# EAGLE board pcb (EAGLE 6.1)
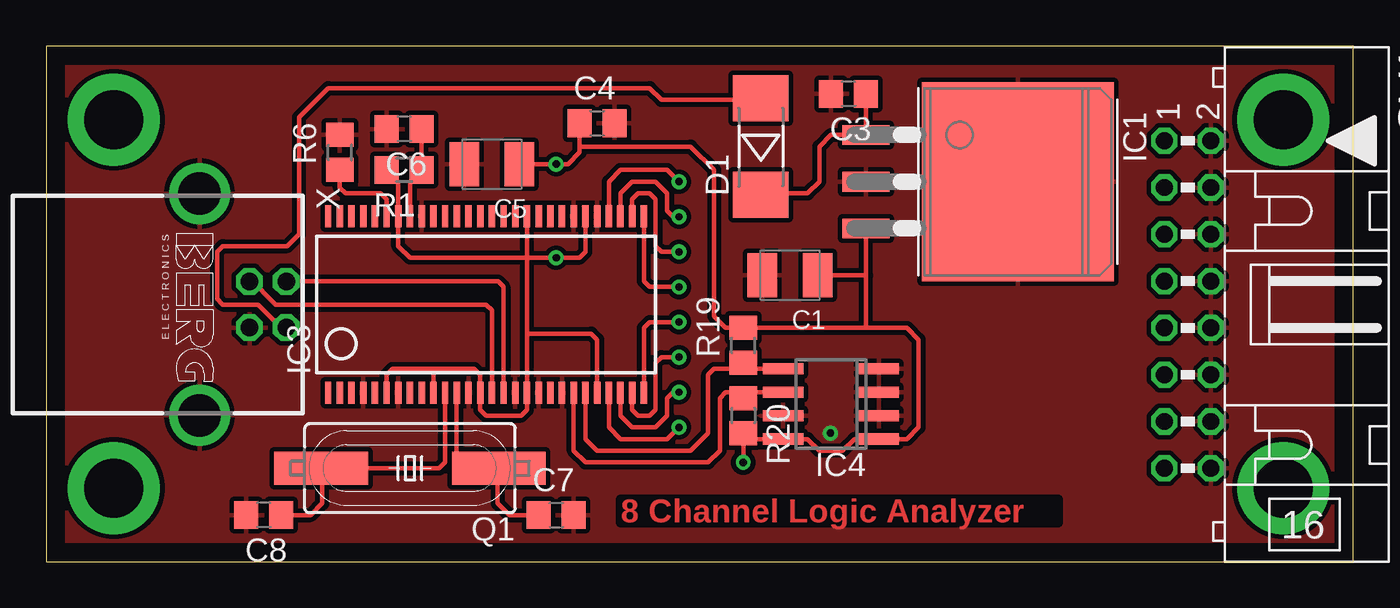
[diagram p0: board, top side]
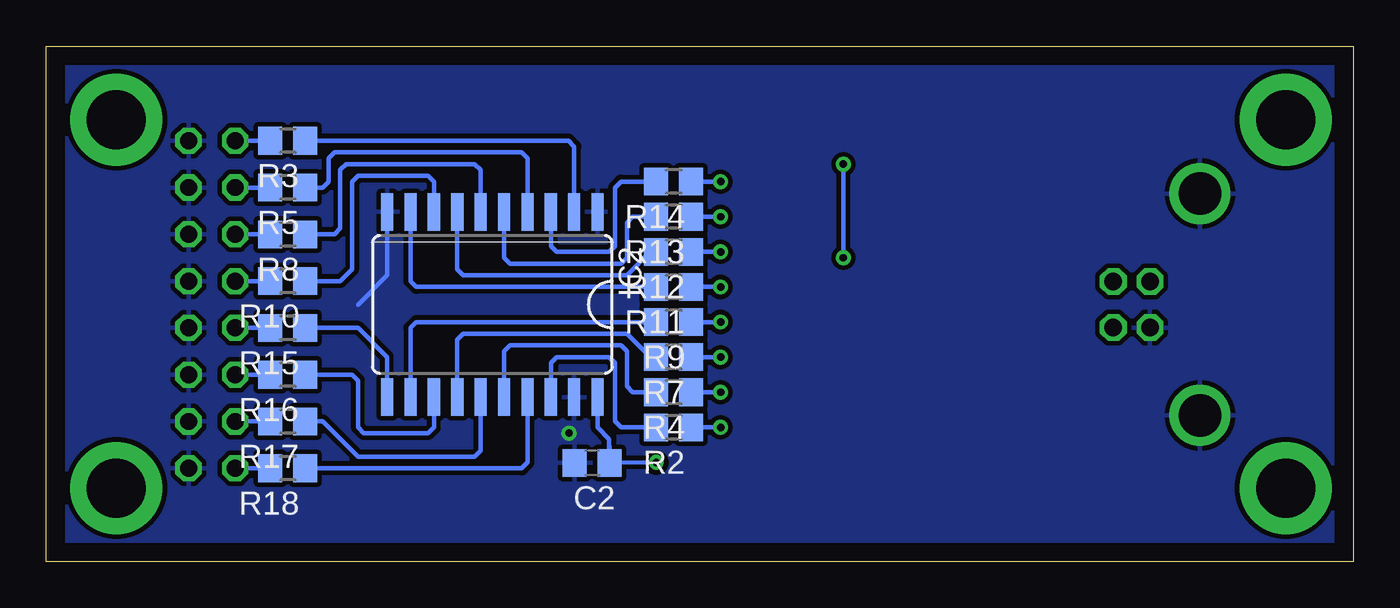
[diagram p1: board, bottom side, seen from below]

Size 71 x 28 mm. Coordinates in mm from the lower left corner, seen from the top.
Outline: 0,0 71,0 71,28 0,28 0,0
Copper layers (1*16): Top 0.035mm / dielectric 1.5mm / Bottom 0.035mm
Design rules: minimum track width 10mil, minimum drill 24mil, track to track 10mil, track to pad 10mil, pad to pad 10mil, via to via 10mil, smd to smd 10mil, copper to edge 40mil, drill to drill 8mil, minimum pad ring 10mil, minimum via ring 8mil, stop-mask expansion 4mil, vias tented up to drill 0mil, thermal gap 10mil

## Footprints (pad centres in the part's own frame; a part is rotated, then mirrored left to right if it is on the bottom)
SMC_B = smd 1.6 x 2.4: + -1.5,0; - 1.5,0
C0805 = smd 1.3 x 1.5: 1 -0.95,0; 2 0.95,0
MELF-MLL41 = smd 2.5 x 3: A 2.625,0; C -2.625,0
TO263 = smd 1.067 x 2.54: GND 0,0; IN -2.54,0; OUT 2.54,0 | smd 10.795 x 10.414: GND@ 0,8.255
SO20W = smd 0.66 x 2.032: 1 -5.715,-5.029; 2 -4.445,-5.029; 3 -3.175,-5.029; 4 -1.905,-5.029; 5 -0.635,-5.029; 6 0.635,-5.029; 7 1.905,-5.029; 8 3.175,-5.029; 9 4.445,-5.029; 10 5.715,-5.029; 11 5.715,5.029; 12 4.445,5.029; 13 3.175,5.029; 14 1.905,5.029; 15 0.635,5.029; 16 -0.635,5.029; 17 -1.905,5.029; 18 -3.175,5.029; 19 -4.445,5.029; 20 -5.715,5.029
SSOP56 = smd 0.35 x 1.2: 1 -8.572,-4.8; 2 -7.938,-4.8; 3 -7.303,-4.8; 4 -6.668,-4.8; 5 -6.032,-4.8; 6 -5.397,-4.8; 7 -4.763,-4.8; 8 -4.128,-4.8; 9 -3.493,-4.8; 10 -2.857,-4.8; 11 -2.223,-4.8; 12 -1.587,-4.8; 13 -0.953,-4.8; 14 -0.318,-4.8; 15 0.318,-4.8; 16 0.953,-4.8; 17 1.587,-4.8; 18 2.223,-4.8; 19 2.857,-4.8; 20 3.493,-4.8; 21 4.128,-4.8; 22 4.763,-4.8; 23 5.397,-4.8; 24 6.032,-4.8; 25 6.668,-4.8; 26 7.303,-4.8; 27 7.938,-4.8; 28 8.572,-4.8; 29 8.572,4.8; 30 7.938,4.8; 31 7.303,4.8; 32 6.668,4.8; 33 6.032,4.8; 34 5.397,4.8; 35 4.763,4.8; 36 4.128,4.8; 37 3.493,4.8; 38 2.857,4.8; 39 2.223,4.8; 40 1.587,4.8; 41 0.953,4.8; 42 0.318,4.8; 43 -0.318,4.8; 44 -0.953,4.8; 45 -1.587,4.8; 46 -2.223,4.8; 47 -2.857,4.8; 48 -3.493,4.8; 49 -4.128,4.8; 50 -4.763,4.8; 51 -5.397,4.8; 52 -6.032,4.8; 53 -6.668,4.8; 54 -7.303,4.8; 55 -7.938,4.8; 56 -8.572,4.8
SO-08 = smd 0.6 x 2.2: 1 -1.905,-2.6; 2 -0.635,-2.6; 3 0.635,-2.6; 4 1.905,-2.6; 5 1.905,2.6; 6 0.635,2.6; 7 -0.635,2.6; 8 -1.905,2.6
SM49 = smd 5.08 x 1.778: 1 -4.826,0; 2 4.826,0
R0805 = smd 1.3 x 1.5: 1 -0.95,0; 2 0.95,0
ML16L = drill 0.914 octagon: 1 -8.89,-1.27; 2 -8.89,1.27; 3 -6.35,-1.27; 4 -6.35,1.27; 5 -3.81,-1.27; 6 -3.81,1.27; 7 -1.27,-1.27; 8 -1.27,1.27; 9 1.27,-1.27; 10 1.27,1.27; 11 3.81,-1.27; 12 3.81,1.27; 13 6.35,-1.27; 14 6.35,1.27; 15 8.89,-1.27; 16 8.89,1.27
PN61729-S = drill 0.95 octagon: 1 1.25,4.71; 2 -1.25,4.71; 3 -1.25,2.71; 4 1.25,2.71 | drill 2.3 pad 2.9: S1 -6.02,0; S2 6.02,0

## Placement (x,y rotation side)
C1  2µ2  [SMC_B]  40.4,15.56 180 top
C2  100n  [C0805]  41.34,5.37 180 bottom
C3  100n  [C0805]  43.58,25.4 180 top
C4  100n  [C0805]  29.92,23.81 0 top
C5  2µ2  [SMC_B]  24.21,21.59 180 top
C6  100n  [C0805]  19.45,23.5 180 top
C7  12p  [C0805]  27.7,2.54 0 top
C8  12p  [C0805]  11.83,2.54 180 top
D1  1N4148  [MELF-MLL41]  38.81,22.54 90 top
IC1  LM2937ES-3.3  [TO263]  44.53,20.64 270 top
IC2  74LVC244  [SO20W]  46.76,13.97 180 bottom
IC3  CY7C68013A-56PVXC  [SSOP56]  23.89,13.97 0 top
IC4  24LC64SN  [SO-08]  42.62,8.57 90 top
Q1  24MHz  [SM49]  19.76,5.08 180 top
R1  100k  [R0805]  19.45,21.27 180 top
R2  47R  [R0805]  36.92,7.3 180 bottom
R3  47R  [R0805]  57.88,22.86 180 bottom
R4  47R  [R0805]  36.92,9.21 180 bottom
R5  47R  [R0805]  57.88,20.32 180 bottom
R6  100k  [R0805]  15.96,22.23 90 top
R7  47R  [R0805]  36.92,11.11 180 bottom
R8  47R  [R0805]  57.88,17.78 180 bottom
R9  47R  [R0805]  36.92,13.02 180 bottom
R10  47R  [R0805]  57.88,15.24 180 bottom
R11  47R  [R0805]  36.92,14.92 180 bottom
R12  47R  [R0805]  36.92,16.83 180 bottom
R13  47R  [R0805]  36.92,18.73 180 bottom
R14  47R  [R0805]  36.92,20.64 180 bottom
R15  47R  [R0805]  57.88,12.7 180 bottom
R16  47R  [R0805]  57.88,10.16 180 bottom
R17  47R  [R0805]  57.88,7.62 180 bottom
R18  47R  [R0805]  57.88,5.08 180 bottom
R19  2k2  [R0805]  37.86,11.75 90 top
R20  2k2  [R0805]  37.86,7.94 270 top
SV1  Probe  [ML16L]  61.99,13.97 270 top
X  PN61729-S  [PN61729-S]  8.34,13.97 270 top

## Library data of the parts
C1-C8 R1-R20 = rcl
D1 = diode
IC1 = lm2937
IC2 = 74xx-eu
IC3 = cypress
IC4 = microchip
Q1 = crystal
SV1 = con-ml
X = con-berg

## Nets
+3V3: C1.+ C2.1 C4.1 C5.+ IC1.OUT IC2.20 IC3.6 IC3.10 IC3.14 IC3.18 IC3.24 IC3.34 IC3.39 IC3.50 IC4.1 IC4.8 R1.2 R19.2 R20.2
+5V: C3.1 D1.C IC1.IN
GND: C1.- C2.2 C3.2 C4.2 C5.- C6.2 C7.2 C8.2 IC1.GND IC1.GND@ IC2.1 IC2.10 IC2.19 IC3.4 IC3.7 IC3.13 IC3.17 IC3.19 IC3.21 IC3.33 IC3.35 IC3.48 IC4.2 IC4.3 IC4.4 IC4.7 R6.2 SV1.2 SV1.4 SV1.6 SV1.8 SV1.10 SV1.12 SV1.14 SV1.16 X.4 X.S1 X.S2
N$1: IC3.16 X.2
N$2: IC3.15 X.3
N$3: C8.1 IC3.11 Q1.2
N$4: C7.1 IC3.12 Q1.1
N$5: D1.A X.1
N$6: IC3.25 R2.1
N$7: IC3.26 R4.1
N$8: IC3.27 R7.1
N$9: IC3.28 R9.1
N$10: IC3.29 R11.1
N$11: IC3.30 R12.1
N$12: IC3.31 R13.1
N$13: C6.1 IC3.49 R1.1
N$14: IC3.22 IC4.6 R20.1
N$15: IC3.23 IC4.5 R19.1
N$16: IC3.32 R14.1
N$17: IC3.51 R6.1
N$18: R10.2 SV1.7
N$19: R15.2 SV1.9
N$20: R16.2 SV1.11
N$21: R17.2 SV1.13
N$22: R18.2 SV1.15
N$23: R8.2 SV1.5
N$24: R5.2 SV1.3
N$25: R3.2 SV1.1
N$26: IC2.18 R2.2
N$27: IC2.16 R4.2
N$28: IC2.14 R7.2
N$29: IC2.12 R9.2
N$30: IC2.11 R15.1
N$31: IC2.9 R11.2
N$32: IC2.15 R17.1
N$33: IC2.7 R12.2
N$34: IC2.2 R3.1
N$35: IC2.4 R5.1
N$36: IC2.6 R8.1
N$37: IC2.8 R10.1
N$38: IC2.13 R16.1
N$39: IC2.5 R13.2
N$40: IC2.3 R14.2
N$41: IC2.17 R18.1

## Tracks (layer width: path | path; a pad name or v marks a point on that pad's centre or on a via)
+3V3  (via drill 0.4)
  Top 0.254: IC4.8 38.5,6.67 R20.2 37.86,6.67 | IC4.1 46.75,6.67 47.39,7.3 47.39,12.06 46.75,12.7 44.53,12.7 | R1.2 19.13,20.64 IC3.50 19.13,17.14 19.77,16.51 26.12,16.51 | 26.12,16.51 IC3.39 | IC3.34 29.29,16.83 28.97,16.51 v27.7,16.51 26.12,16.51 | 21.04,10.48 23.26,10.48 23.58,10.16 IC3.14 23.58,8.26 23.89,7.94 25.8,7.94 26.12,8.26 IC3.18 26.12,12.38 | 26.12,12.38 26.12,16.51 | 21.04,10.48 IC3.10 | 21.04,10.48 18.81,10.48 18.5,10.16 IC3.6 | IC3.24 29.93,12.06 29.61,12.38 26.12,12.38 | IC4.8 37.86,6.67 | 37.86,6.67 37.86,7.3 | 37.86,6.67 v37.86,5.4 | 28.97,22.54 35.01,22.54 36.28,21.27 36.28,13.34 36.91,12.7 R19.2 41.68,12.7 42.63,12.7 44.53,12.7 | IC4.1 45.17,6.61 | IC4.8 41.36,6.67 41.99,6.03 43.26,6.03 43.9,6.67 IC4.1 | C4.1 28.97,22.54 | 44.53,12.7 44.53,15.56 | 44.53,15.56 IC1.OUT | 41.99,15.47 C1.+ 44.53,15.56 | 28.97,22.54 28.97,22.23 28.34,21.59 v27.7,21.59 C5.+ 25.71,21.27
  Bottom 0.254: IC2.20 41.05,7.3 40.41,6.67 | 40.41,6.67 40.39,6.01 C2.1 | v27.7,16.51 v27.7,21.59 | 40.41,6.67 C2.1 v37.86,5.4
+5V
  Top 0.254: 39.05,19.05 D1.C 38.9,20 41.36,20 41.99,20.64 41.99,22.54 42.63,23.18 43.9,23.18 | 43.9,23.18 IC1.IN | C3.1 IC1.IN 43.9,23.18
GND  (via drill 0.4)
  Bottom 0.254: IC2.10 52.48,15.56 54.07,13.97 | 42.29,4.74 42.29,6.01 C2.2
  other vias: 42.6,6.99
  pour Top: -0.14,27.94 71.06,27.94 71.11,0.05 -0.09,0.05
  pour Bottom: -0.08,27.94 71.04,27.94 70.97,0.05 -0.08,0.13
N$1
  Top 0.254: X.2 24.55,15.22 24.85,14.92 IC3.16
N$2
  Top 0.254: X.3 11.05,15.39 12.46,13.97 23.89,13.97 24.21,13.65 IC3.15
N$3
  Top 0.254: IC3.11 21.67,5.4 21.35,5.08 Q1.2 15,5.02 15,3.17 14.37,2.54 C8.1
N$4
  Top 0.254: IC3.12 22.31,5.4 22.62,5.08 Q1.1 24.53,5.02 24.53,3.17 25.16,2.54 C7.1
N$5
  Top 0.254: X.1 12.76,12.72 11.51,13.97 9.61,13.97 9.29,14.29 9.29,16.83 9.61,17.14 13.1,17.14 13.73,17.78 13.73,24.13 15.32,25.72 32.78,25.72 33.42,25.08 38.73,25.08 D1.A
N$6  (via drill 0.4)
  Top 0.254: IC3.25 30.56,7.3 31.2,6.67 33.74,6.67 v34.37,7.3
  Bottom 0.254: v34.37,7.3 R2.1
N$7  (via drill 0.4)
  Top 0.254: v34.37,9.21 34.05,9.21 33.74,8.89 33.74,7.94 33.1,7.3 31.83,7.3 31.2,7.94 IC3.26
  Bottom 0.254: v34.37,9.21 R4.1
N$8  (via drill 0.4)
  Top 0.254: IC3.27 31.83,8.26 32.15,7.94 32.78,7.94 33.1,8.26 33.1,10.79 33.42,11.11 v34.37,11.11
  Bottom 0.254: v34.37,11.11 R7.1
N$9  (via drill 0.4)
  Top 0.254: v34.37,13.02 32.78,13.02 32.47,12.7 IC3.28
  Bottom 0.254: v34.37,13.02 R9.1
N$10  (via drill 0.4)
  Top 0.254: v34.37,14.92 32.78,14.92 32.47,15.24 IC3.29
  Bottom 0.254: v34.37,14.92 R11.1
N$11  (via drill 0.4)
  Top 0.254: IC3.30 31.83,19.68 32.15,20 32.78,20 33.1,19.68 33.1,17.14 33.42,16.83 v34.37,16.83
  Bottom 0.254: v34.37,16.83 R12.1
N$12  (via drill 0.4)
  Top 0.254: v34.37,18.73 34.05,18.73 33.74,19.05 33.74,20 33.1,20.64 31.83,20.64 31.2,20 IC3.31
  Bottom 0.254: v34.37,18.73 R13.1
N$13
  Top 0.254: IC3.49 19.77,20.64 R1.1 | R1.1 20.4,20.95 | R1.1 C6.1
N$14
  Top 0.254: IC4.6 38.5,9.21 R20.1 38.18,9.21 36.91,9.21 36.59,8.89 36.59,6.03 35.96,5.4 29.29,5.4 28.66,6.03 IC3.22
N$15
  Top 0.254: IC4.5 38.5,10.48 R19.1 | IC3.23 29.29,6.67 29.93,6.03 35.01,6.03 35.96,6.99 35.96,10.16 36.28,10.48 37.86,10.48 R19.1 | R19.1 38.18,10.79
N$16  (via drill 0.4)
  Top 0.254: IC3.32 30.56,20.64 31.2,21.27 33.74,21.27 v34.37,20.64
  Bottom 0.254: v34.37,20.64 R14.1
N$17
  Top 0.254: IC3.51 18.5,19.68 18.18,20 16.27,20 15.96,20.32 R6.1
N$18
  Bottom 0.254: R10.2 SV1.7
N$19
  Bottom 0.254: R15.2 SV1.9
N$20
  Bottom 0.254: R16.2 SV1.11
N$21
  Bottom 0.254: R17.2 SV1.13
N$22
  Bottom 0.254: R18.2 SV1.15
N$23
  Bottom 0.254: R8.2 SV1.5
N$24
  Bottom 0.254: R5.2 SV1.3
N$25
  Bottom 0.254: R3.2 SV1.1
N$26
  Bottom 0.254: R2.2 39.78,7.3 40.1,7.62 40.1,10.79 40.41,11.11 43.27,11.11 43.59,10.79 IC2.18
N$27
  Bottom 0.254: R4.2 39.14,9.21 39.46,9.53 39.46,11.43 39.78,11.75 45.81,11.75 46.13,11.43 IC2.16
N$28
  Bottom 0.254: R7.2 38.51,11.43 39.46,12.38 48.35,12.38 48.67,12.06 IC2.14
N$29
  Bottom 0.254: R9.2 50.89,13.02 51.21,12.7 IC2.12
N$30
  Bottom 0.254: IC2.11 52.48,11.11 54.07,12.7 R15.1
N$31
  Bottom 0.254: R11.2 50.89,14.92 51.21,15.24 IC2.9
N$32
  Bottom 0.254: IC2.15 47.4,6.03 47.72,5.71 54.07,5.71 55.97,7.62 R17.1
N$33
  Bottom 0.254: R12.2 38.19,16.83 39.46,15.56 48.35,15.56 48.67,15.88 IC2.7
N$34
  Bottom 0.254: R3.1 42.64,22.86 42.32,22.54 IC2.2
N$35
  Bottom 0.254: R5.1 55.97,20.32 55.65,20.64 55.65,21.91 55.34,22.23 45.18,22.23 44.86,21.91 IC2.4
N$36
  Bottom 0.254: R8.1 55.34,17.78 55.02,18.1 55.02,21.27 54.7,21.59 47.72,21.59 47.4,21.27 IC2.6
N$37
  Bottom 0.254: R10.1 55.02,15.24 54.38,15.88 54.38,20.64 54.07,20.95 50.26,20.95 49.94,20.64 IC2.8
N$38
  Bottom 0.254: IC2.13 49.94,7.3 50.26,6.99 53.75,6.99 54.07,7.3 54.07,9.84 54.38,10.16 R16.1
N$39
  Bottom 0.254: R13.2 39.14,18.73 39.46,18.41 39.46,16.51 39.78,16.19 45.81,16.19 46.13,16.51 IC2.5
N$40
  Bottom 0.254: R14.2 39.78,20.64 40.1,20.32 40.1,17.14 40.41,16.83 43.27,16.83 43.59,17.14 IC2.3
N$41
  Bottom 0.254: R18.1 45.18,5.08 44.86,5.4 IC2.17
N$42  (via drill 3.2 pad 5)
  other vias: 3.68,24
N$43  (via drill 3.2 pad 5)
  other vias: 3.68,4
N$44  (via drill 3.2 pad 5)
  other vias: 67.18,24
N$45  (via drill 3.2 pad 5)
  other vias: 67.18,4

## Text on the board
Top: 8 Channel Logic Analyzer
ResistanceTop: 17.6mo | 2.3mo | 5.4mo | 2.2mo | 2.2mo | 1.3mo | 1.3mo | 2.0mo | 6.1mo | 1.8mo | 6.4mo | 1.3mo | 2.6mo | 1.9mo | 1.9mo | 2.5mo | 1.9mo | 1.9mo | 1.9mo | 1.2mo | 1.6mo | 2.6mo | 3.5mo | 2.3mo | 2.0mo | 3.6mo | 8.0mo | 6.4mo | 1.6mo | 1.3mo | 2.6mo | 2.6mo | 2.0mo | 11.6mo | 1.6mo | 2.7mo | 1.9mo | 1.8mo | 11.5mo | 4.2mo | 2.9mo | 1.6mo | 3.8mo | 1.9mo | 2.2mo | 5.8mo | 3.5mo | 4.5mo | 3.6mo | 2.2mo | 2.2mo | 3.2mo | 2.9mo | 1.6mo | 1.5mo | 1.3mo | 2.6mo | 1.3mo | 1.5mo | 4.8mo | 1.9mo | 2.5mo | 1.9mo | 1.2mo | 3.2mo | 2.6mo | 3.8mo | 3.8mo | 3.2mo | 1.3mo | 2.6mo | 2.9mo | 2.2mo | 1.5mo | 1.3mo | 1.3mo | 1.5mo | 5.1mo | 1.4mo | 1.3mo | 1.3mo | 6.5mo | 2.0mo | 6.7mo | 1.9mo | 1.9mo | 1.6mo | 1.6mo
ResistanceBottom: 17.8mo | 1.8mo | 14.4mo | 1.4mo | 1.3mo | 10.3mo | 7.0mo | 4.9mo | 1.9mo | 3.9mo | 3.8mo | 1.3mo | 2.6mo | 3.6mo | 2.9mo | 2.3mo | 1.4mo | 5.1mo | 4.9mo | 1.3mo | 1.7mo | 3.2mo | 2.6mo | 3.2mo | 1.9mo | 4.8mo | 1.6mo | 1.4mo | 4.9mo | 1.9mo | 2.9mo | 2.5mo | 3.2mo | 3.8mo | 3.5mo | 1.8mo | 6.1mo | 2.6mo | 4.9mo | 9.0mo | 13.1mo | 2.3mo | 1.9mo | 1.4mo | 1.3mo | 6.0mo | 4.9mo | 13.1mo | 2.9mo | 1.4mo | 1.3mo | 1.4mo | 6.1mo | 9.0mo | 2.3mo | 4.9mo | 2.9mo | 2.6mo | 1.9mo | 1.9mo | 2.5mo | 3.2mo | 3.8mo | 2.2mo | 2.6mo | 1.4mo | 4.9mo | 1.3mo | 3.2mo | 2.6mo | 1.7mo | 2.0mo | 1.7mo | 2.6mo | 1.4mo | 4.9mo | 1.9mo | 3.0mo | 3.6mo | 2.9mo | 3.5mo | 1.3mo | 6.4mo | 2.7mo | 2.6mo | 5.9mo | 1.3mo | 11.9mo | 1.4mo | 1.3mo | 1.4mo | 16.9mo